# Altium PCB Copy of PCB1.PcbDoc (part 2 of 2)
Units mil, origin at the board's own origin, x right, y up, seen from the top; angles counter-clockwise.
Board outline 966 x 2841 mil, 4 copper layers (Top Layer, GND, POWER, Bottom Layer), stack 23.756 mil thick; 134 components, 79 nets, 491 pads, 121 vias.
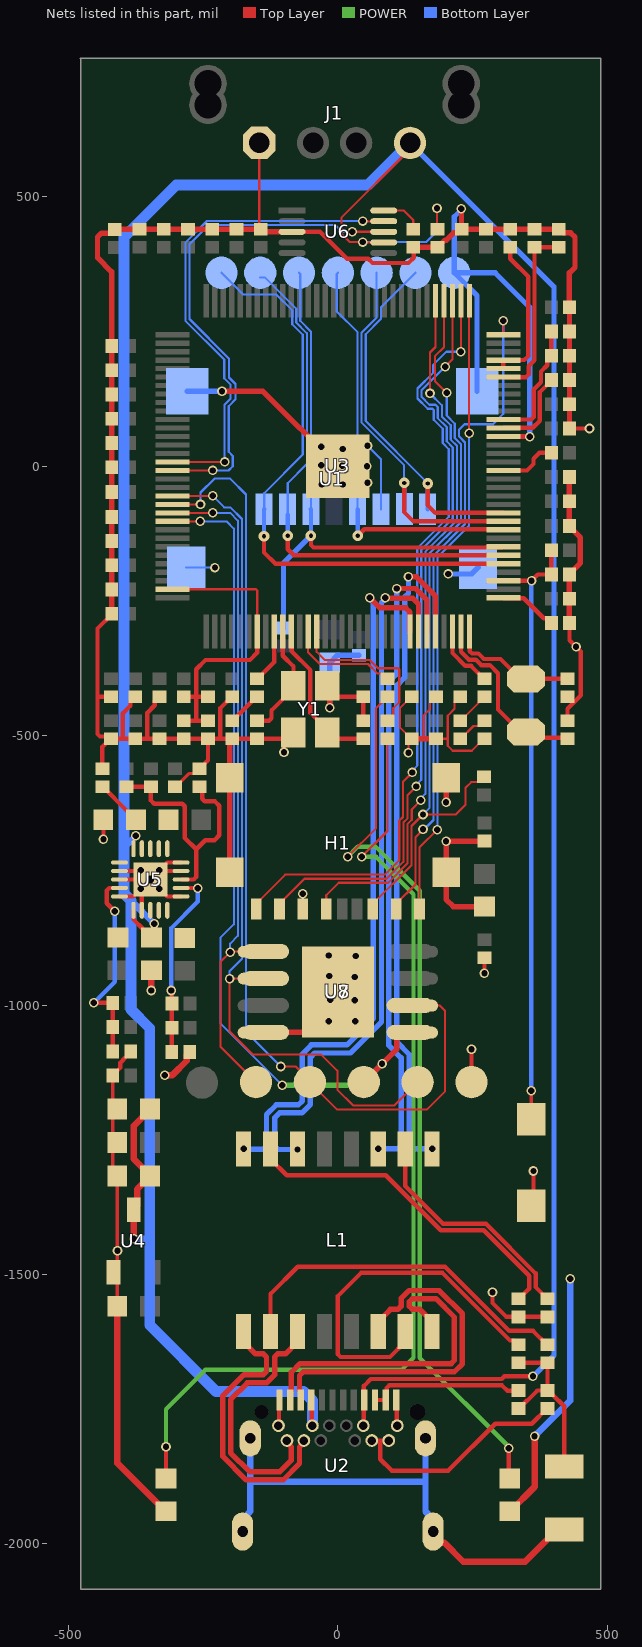
[diagram p4: the nets of this part, all layers, seen from the top]

## Via types
v1: diameter 17.72, hole 11.81, Top Layer to Bottom Layer, 111 vias
v2: diameter 19.68, hole 7.87, Top Layer to Bottom Layer, 6 vias
v3: diameter 20, hole 12, Top Layer to Bottom Layer, tented both sides, 4 vias

## Nets (pads, with @x,y where several pads share a name; then routed paths per layer and width w, separated by ;. In a path a pad name is that pad's centre, name@x,y a point inside that pad or via, vN(x,y) a via of type N, cw(c..) or ccw(c..) an arc to the next point about the centre after c; other vN are vias at no path point) (continued)
EGD: C17.2 R4.1 R5.1 R7.2 R8.2 | length 330.1
  Top Layer w8: R7.2@335,-1748.73 335.98,-1748.73 349.45,-1735.26 ; R5.1@335,-1663.73 R4.1@389,-1663.73 R8.2@389,-1715.27 ; C17.2@420,-1856.34 420,-1744.52 398.56,-1723.08 396.81,-1723.08 R8.2@389,-1715.27 ; 349.45,-1735.26 350.14,-1734.58 350.9,-1734.58 ; 349.45,-1735.26 350.22,-1735.26 350.9,-1734.58 ; 350.9,-1734.58 370.21,-1715.27 R8.2@389,-1715.27
FLASH1_CLK: TP11.1 U3.53 U7.6 U8.6 | length 1842.5
  Top Layer w4: U3.53@-307.09,-70.86 -306.95,-71 v1(-254.95,-71) ; v1(-106,-1114) -78,-1114 -52,-1140 TP11.1@-52,-1143 -1,-1194 165,-1194 199,-1160 199,-1011 188.67,-1000.67 U8.6@133.86,-1000.67 U8.6@134.03,-1000.83
  Bottom Layer w4: v1(-254.95,-71) -254.95,-48.95 -229,-23 -200,-23 -170.5,-52.5 -170.5,-1049.5 v1(-106,-1114)
FLASH1_CS: TP8.1 U3.54 U7.1 U8.1 | length 1277
  Top Layer w4: U3.54@-307.09,-86.61 v1(-232.09,-86.61) ; TP8.1@-152,-1143 -218,-1077 -218,-920 v1(-200,-902) -198.83,-900.83 -134.03,-900.83 U8.1@-133.86,-900.67
  Bottom Layer w4: v1(-232.09,-86.61) -199.89,-86.61 -185.5,-101 -185.5,-871.5 -200,-886 v1(-200,-902)
FLASH1_MISO: TP10.1 U3.52 U7.2 U8.2 | length 1618.9
  Top Layer w4: U3.52@-307.09,-55.12 v1(-232.09,-55.12) ; U8.2@-133.86,-950.67 -134.03,-950.83 -200.83,-950.83 v1(-201,-951) -201,-1048.48 -157.48,-1092 -31,-1092 -1,-1122 -1,-1157 28.5,-1186.5 104.5,-1186.5 TP10.1@148,-1143
  Bottom Layer w4: v1(-232.09,-55.12) -210.89,-76.32 -199.57,-76.32 -178,-97.89 -178,-914 -201,-937 v1(-201,-951)
FLASH1_MOSI: TP13.1 U3.55 U7.5 U8.5 | length 1598.4
  Top Layer w4: U3.55@-307.09,-102.36 v1(-255.09,-102.36) ; U8.5@133.86,-1050.67 U8.5@134.19,-1050.33
  Top Layer w10: v1(82,-1109) TP13.1@48,-1143 109.33,-1081.67 109.33,-1058.78 117.44,-1050.67 U8.5@133.86,-1050.67
  POWER w10: v1(-103,-1149) 42,-1149 v1(82,-1109)
  Bottom Layer w4: v1(-255.09,-102.36) -206.64,-102.36 -193,-116 -193,-850 -218,-875 -218,-1034 v1(-103,-1149)
GND: C1.2 C2.1 C3.2 C4.1 C5.1 C6.1 C7.1 C8.2 C9.1 C10.1 C11.1 C12.1 C13.1 C14.2 C15.1 C16.1 C18.2 C19.1 C20.1 C21.1 C22.1 C23.1 C24.1 C25.1 C26.1 C27.1 C28.1 C29.1 C30.1 C31.1 C32.1 C33.1 C34.1 C35.1 C36.1 C37.1 C38.1 C39.1 C40.1 C41.1 C42.1 C43.1 C44.1 C45.1 C47.1 C48.1 C49.1 C50.1 C51.1 C52.1 C53.1 C54.1 C55.1 C56.1 C57.1 C58.1 C59.1 C60.1 C61.1 C62.1 C63.1 C64.1 C65.1 C67.1 C68.1 C69.1 C70.1 C72.1 C73.1 C74.1 C76.1 D1.K D2.K H1.6 H1.10 H1.11 H1.12 H1.13 J1.1 R3.1 R11.2 R15.2 R18.2 R20.1 R22.2 R24.2 S1.2 TP7.1 TP12.1 U1.6 U1.9 U1.10 U1.11 U1.12 U2.A1 U2.A12 U2.B1 U2.B12 U3.0 U3.116 U4.1 U5.0 U5.1 U5.4 U5.5 U5.12 U5.13 U5.15 U5.17 U6.3 U7.4 U7.9 U8.4 Y1.2 Y1.4 | length 9514.1
  Top Layer w4: C55.1@-419.73,-274.98 C55.1@-419.73,-274 ; C27.1@-414,439.46 -143.27,439.46 -138.99,435.19 -138.8,435 U6.3@-85,435 ; R15.2@-200.78,-510.52 R15.2@-196,-505.73 ; C39.1@-146,442.2 J1.1@-146,600 ; U7.9@-64.95,-1050.67 0,-985.72 U7.9@0,-976 ; H1.6@-64.95,-831.59 H1.6@-64.95,-821.75 ; H1.6@-64.88,-826.67 v1(-64.88,-793.29) ; U3.0@0,0 U3.0@55,55 ; v1(131,-532) 131,-511.73 C16.1@137,-505.73 136.02,-505.73 115,-484.72 115,-449 126.2,-437.8 126.2,-437.54 136.02,-427.73 C56.1@137,-427.73 ; 159.5,-505.73 159.5,-462.38 171.2,-450.68 171.2,-437.54 181.02,-427.73 C25.1@182,-427.73 ; C24.1@182,-505.73 203.27,-505.73 204,-505 ; C23.1@227,-427.73 226.02,-427.73 216.2,-437.54 216.2,-450.68 204,-462.88 204,-505 ; R11.2@272,-505.73 271.02,-505.73 248.75,-528 213,-528 204,-519 204,-505 ; U3.116@307.09,55.11 U3.116@307.09,55.11 ; v1@355.94,55.06 v1(356,55) ; C19.1@429.73,-111.98 C19.1@429.73,-111
  Top Layer w6: C67.1@-417.73,-1131 -417.73,-1308.58 C50.1@-409.32,-1317 C51.1@-409.32,-1559 ; C72.1@-302,-595 -301.02,-595 -276.36,-570.35 -265.81,-570.35 R22.2@-257,-561.54
  Top Layer w8: C52.1@-437,-561.54 -437,-520.75 -421.98,-505.73 C58.1@-421,-505.73 ; C70.1@-435.32,-656 -435,-656.32 v1(-435,-692) ; C40.1@-421,-428 -445,-428 -446,-429 ; C55.1@-419.73,-274.98 -446,-301.25 -446,-429 ; C67.1@-417.73,-1131 -417.73,-1130.02 -403.58,-1115.86 -403.58,-1107.06 -398.42,-1101.9 -398.42,-1101.14 -384.27,-1086.98 R20.1@-384.27,-1086 ; U5.15@-405.13,-798.49 -379.49,-798.49 U5.0@-365.53,-784.53 ; U5.13@-405.13,-766.99 U5.0@-348,-767 ; U5.12@-405.13,-751.24 -363.76,-751.24 U5.0@-348,-767 ; C59.1@-376,-427.73 -376.98,-427.73 -384.8,-435.54 -384.8,-444.28 -399,-458.48 -399,-505.73 ; U5.17@-363.75,-824.13 -363.75,-782.75 U5.0@-348,-767 ; C48.1@-331,-427.73 -331.98,-427.73 -339.8,-435.54 -339.8,-443.78 -353.51,-457.49 -353.51,-505.22 -353,-505.73 ; D1.K@-319,-1939.31 D1.K@-319,-1939 ; U5.1@-290.87,-798.5 -316.5,-798.5 U5.0@-348,-767 ; U5.4@-290.87,-751.25 U5.0@-332.25,-751.25 ; U5.5@-290.87,-735.5 -316.5,-735.5 U5.0@-332.25,-751.25 ; R22.2@-257,-561.54 -256.02,-561.54 -248.2,-553.72 -248.2,-552.74 -241,-545.54 C47.1@-241,-505.73 ; C57.1@-196,-427.73 -196.98,-427.73 -218,-448.75 -218,-505.73 ; U2.B12@-110.24,-1780.59 -109.25,-1779.6 -109.25,-1733.94 U2.A1@-108.26,-1732.95 ; v1(-100,-531) -100,-510.73 -97,-507.73 Y1.4@-99,-505.73 ; U6.3@-85,435 -33,435 17,385 56.26,385 64.26,377 131,377 141,387 141,405.27 C68.1@140,406.27 ; Y1.4@-82.5,-494.31 -93.92,-505.73 Y1.4@-99,-505.73 ; Y1.2@-15,-413.6 -0.87,-427.73 C32.1@47,-427.73 C28.1@47,-472.27 ; U2.A12@108.27,-1732.95 109.25,-1733.93 109.25,-1779.6 U2.B1@110.23,-1780.59 ; TP12.1@248,-1143 v1(248,-1082) ; v1(272,-941) C6.1@272,-912.46 ; v1(287,-1533) 287,-1553 312.73,-1578.73 C8.2@335,-1578.73 C1.2@389,-1578.73 ; S1.2@363,-1372.12 v1(363,-1308) ; C38.1@426,-472.27 426,-450 451,-425 451,-344 v1(442,-335) 429.87,-322.87 429.87,-291.13 C18.2@429.73,-291 ; C14.2@430,70 v1(467,70) ; -446,-429 -446,-497 -441.31,-501.69 -425.05,-501.69 C58.1@-421,-505.73 ; C58.1@-421,-505.73 -399,-505.73 ; -399,-505.73 -353,-505.73 ; -353,-505.73 C47.1@-241,-505.73 ; U5.0@-348,-767 U5.0@-332.25,-751.25 ; C47.1@-241,-505.73 -218,-505.73 ; -218,-505.73 R15.2@-196,-505.73 Y1.4@-99,-505.73
  Top Layer w9: U3.116@307.09,55.11 v1@355.94,55.06
  Top Layer w10: C55.1@-419.73,-274 C30.1@-419.73,-229 C44.1@-419.73,-184 C43.1@-419.73,-139 C42.1@-419.73,-94 C60.1@-419.73,-48 C54.1@-419.73,-2 C61.1@-419.73,88 C63.1@-419.73,133 C53.1@-419.73,178 C64.1@-419.73,223 -419.73,360.73 -446,387 -446,425 -438.35,432.65 -420.81,432.65 C27.1@-414,439.46 -413.87,439.6 -143.4,439.6 C39.1@-143.27,439.46 ; v1(-215,139) -139,139 U3.0@0,0 ; H1.10@-200.78,-753.44 H1.11@-200.78,-578.25 R15.2@-200.78,-510.52 ; C39.1@-138.99,435.19 -85.19,435.19 U6.3@-85,435 ; U8.4@-133.86,-1050.67 U7.9@-64.95,-1050.67 ; Y1.2@-19.5,-407.69 -15,-412.2 -15,-413.6 v1(-15,-448) ; C16.1@137,-505.73 159.5,-505.73 C24.1@182,-505.73 ; C68.1@140,406.27 C69.1@185,406.27 185.98,406.27 199.14,419.42 201.32,419.42 214.82,432.92 223.19,432.92 C31.1@230,439.73 ; v1(200.78,-696) H1.13@200.78,-753.44 200.78,-803.78 214.31,-817.32 C7.1@272,-817.32 ; v1@200.78,-695.73 C73.1@272,-695.73 ; v1(200.78,-623.78) H1.12@200.78,-578.25 ; v1(229,478) 229.5,477.5 229.5,440.23 C31.1@230,439.73 ; C18.2@429.73,-291 C41.1@429.73,-201 429.73,-200.02 450.08,-179.66 450.08,-132.34 C19.1@429.73,-111.98 ; C19.1@429.73,-111 C20.1@429.73,-65 C15.1@429.73,-20 C15.1@429.73,-19.02 ; C14.2@430,70 429.87,70.13 429.87,294.87 C21.1@429.73,295 429.73,358.76 440,369.03 440,425 432.08,432.92 416.81,432.92 C3.2@410,439.73 C31.1@230,439.73
  Top Layer w12: C51.1@-409.32,-1559 -409.32,-1849.98 -319.98,-1939.31 D1.K@-319,-1939.31 ; v1(-346,-973) C74.1@-346,-935.32 ; v1(-320.95,-1129.95) -307,-1130 -280.61,-1103.61 -280.61,-1092.81 R24.2@-274.8,-1087 ; D2.K@319,-1939.31 319.98,-1939.31 365,-1894.3 v1(365,-1800)
  Bottom Layer w4: U1.12@-281.49,-188.07 v1(-228.07,-188.07) ; v1(55,38) 80,13 U1.6@80,-80
  Bottom Layer w10: U1.9@-279.91,138.86 -279.77,139 v1(-215,139) ; v1(-15,-448) C10.1@-15,-364.32 -14.02,-364.32 -0.43,-350.73 C9.1@39,-350.73 ; v1(205,-200) 248.31,-200 U1.11@260.24,-188.07 ; v1(229,478) 229,475.91 216,462.91 TP7.1@216,359 ; U1.10@258.27,138.86 258.27,316.72 TP7.1@216,359 ; v1(356,55) 356,295 292,359 TP7.1@216,359
  Bottom Layer w12: v1(365,-1800) 431,-1734 v1(431,-1508)
  other v1: -408.95,-1455.95 -17,-1030 32,-1030 31,-991 -14,-990 31,-948 -16,-946 33,-909 -17,-908 -30,-34 9,-34 55,-31 54,0 8,1 -31,2 9,32 -31,36
  other v3: -365.67,-784.4 -331.37,-784.4 -365.67,-749.6 -331.37,-749.6
GROUND: C17.1 U2.1 U2.2 U2.3 U2.4 | length 978.9
  Top Layer w12: U2.3@176.77,-1977.04 176.77,-1985.38 189.41,-1998.03 197.75,-1998.03 232.73,-2033 347.47,-2033 406.81,-1973.66 C17.1@420,-1973.66
  Bottom Layer w12: U2.2@-176.78,-1977.04 -176.78,-1953.89 -162.6,-1939.72 -162.6,-1885 ; U2.1@-162.6,-1804.21 -162.6,-1885 ; U2.4@162.6,-1804.21 162.6,-1884 ; U2.3@176.77,-1977.04 176.77,-1953.89 162.6,-1939.72 162.6,-1884 ; -162.6,-1885 161.6,-1885 162.6,-1884
HPCOM: C2.2 U3.124 U3.125 | length 281
  Top Layer w8: U3.124@307.09,181.09 U3.125@307.09,196.84 307.24,197 346,197 353.5,204.5 353.5,351.5 320,385 C2.2@320,406.27
LINK: R13.1 U3.77 | length 206
  Top Layer w4: U3.77@-55,-306.97 U3.77@-55.11,-307.09 -55.11,-345.66 -33.64,-367.13 55.88,-367.13 73.2,-384.46 82.19,-384.46 R13.1@92,-394.27
NetC1_1: C1.1 L1.2 | length 434.1
  Top Layer w8: L1.2@125,-1267.26 125,-1335.74 195.26,-1406 275,-1406 367,-1498 367,-1523.27 C1.1@389,-1545.27
NetC8_1: C8.1 L1.7 | length 640.2
  Top Layer w8: L1.7@-125,-1267.26 -125,-1286.02 -95.02,-1316 89,-1316 191,-1418 270.74,-1418 355,-1502.26 355,-1526.25 335.98,-1545.27 C8.1@335,-1545.27
NetC66_1: C66.1 R19.1 R20.2 U5.14 | length 382
  Top Layer w8: v1(-453,-996) C66.1@-417.73,-996 R20.2@-417.73,-1086 ; v1(-413.95,-825.95) -429,-811 -429,-787.49 -424.31,-782.8 -405.2,-782.8 U5.14@-405.13,-782.74
  Bottom Layer w8: v1(-453,-996) -413.95,-956.95 v1(-413.95,-825.95)
NetC71_1: C71.1 R21.1 R22.1 U5.3 | length 477.7
  Top Layer w8: C71.1@-392,-595 R21.1@-347,-595 -347,-620.31 -340.81,-626.5 -288.69,-626.5 -284,-631.19 -284,-690 -263,-711 ; U5.3@-290.87,-767 -267.69,-767 -263,-762.31 -263,-711 ; R22.1@-257,-595 -251.69,-600.31 -251.69,-617.31 -247,-622 -228,-622 -220,-630 -220,-685 -229,-694 -246,-694 -263,-711
NetC75_1: C75.1 R23.1 R24.1 U5.2 | length 355.8
  Top Layer w8: v1(-309,-973) -308.5,-973.5 -308.5,-996.5 R23.1@-308,-997 -308.13,-997.13 -308.13,-1086.87 R24.1@-308.27,-1087 ; U5.2@-290.87,-782.75 -290.8,-782.81 -260.09,-782.81 v1(-259.95,-782.95)
  Bottom Layer w8: v1(-309,-973) -309,-857 -260,-808 v1(-259.95,-782.95)
NetD1_A: D1.A R12.2 | length 1852.2
  Top Layer w4: v1(44,-725) 92,-677 R12.2@92,-505.73
  Top Layer w8: D1.A@-319,-1878.68 v1(-319,-1820)
  POWER w8: v1(-319,-1820) -319,-1750 -246,-1677 118,-1677 140.5,-1654.5 140.5,-794.5 71,-725 v1(44,-725)
NetD2_A: D2.A R13.2 | length 1664.2
  Top Layer w4: v1(18,-725) 71,-672 71,-448.73 81.2,-438.53 81.2,-437.54 91.02,-427.73 R13.2@92,-427.73
  Top Layer w8: v1(316.99,-1822.43) 316.99,-1876.67 D2.A@319,-1878.68
  POWER w8: v1(18,-725) 37,-706 70,-706 152,-788 152,-1654.74 316.99,-1819.72 v1(316.99,-1822.43)
NetL1_10: L1.10 R4.2 | length 664.9
  Top Layer w8: L1.10@-125,-1606 -125,-1536 -74.5,-1485.5 198.76,-1485.5 317.89,-1604.63 362.37,-1604.63 388.02,-1630.27 R4.2@389,-1630.27
NetL1_15: L1.15 R5.2 | length 673.5
  Top Layer w8: L1.15@125,-1606 125,-1624.76 96.76,-1653 5,-1653 0,-1648 0,-1540 43,-1497 194,-1497 319.46,-1622.46 327.19,-1622.46 R5.2@335,-1630.27
NetL2_1: L2.1 U5.11
NetL3_1: L3.1 U5.6
NetL4_1: L4.1 U5.20
NetR6_1: R6.1 U3.112 | length 108.7
  Top Layer w8: U3.112@307.09,-7.88 351.12,-7.88 363,4 363,14 374,25 R6.1@396.27,25
NetR7_1: R7.1 U2.A10 U2.A11 | length 293.7
  Top Layer w8: U2.A10@68.9,-1732.95 U2.A11@88.59,-1732.95 90.49,-1731.04 90.49,-1710.69 95.41,-1705.77 304.77,-1705.77 314.89,-1715.89 334.38,-1715.89 R7.1@335,-1715.27
NetR8_1: R8.1 U2.B2 U2.B3 | length 432.9
  Top Layer w8: U2.B3@62.99,-1808.14 78.74,-1808.14 ; U2.B2@94.48,-1808.14 78.74,-1808.14 ; R8.1@389,-1748.73 388.02,-1748.73 359.75,-1777 292,-1777 205,-1864 100,-1864 78.74,-1842.74 78.74,-1808.14
NetR9_2: R9.2 R10.1 | length 64.3
  Top Layer w4: R10.1@227,-472.27 227.98,-472.27 261.2,-439.05 261.2,-437.54 271.02,-427.73 R9.2@272,-427.73
NetR10_2: R10.2 R11.1 | length 58.9
  Top Layer w4: R10.2@227,-505.73 227.98,-505.73 251.64,-482.08 262.19,-482.08 R11.1@272,-472.27
NetR14_2: R14.2 R15.1 | length 64.7
  Top Layer w8: R15.1@-196,-472.27 -195.02,-472.27 -187.2,-464.46 -187.2,-463.95 -150.98,-427.73 R14.2@-150,-427.73
OSC32_IN: C37.2 U3.96 Y2.1 | length 239.6
  Top Layer w8: U3.96@244.1,-307.09 244.9,-307.89 244.9,-343.62 248.78,-347.5 260.76,-347.5 270.94,-357.68 301.68,-357.68 339,-395 Y2.1@349,-395 349.73,-394.27 C37.2@426,-394.27
OSC32_OUT: C38.2 U3.95 Y2.2 | length 341.2
  Top Layer w8: U3.95@228.35,-307.09 228.38,-307.13 228.38,-344.38 243,-359 256,-359 266.18,-369.18 282.12,-369.18 297,-384.05 297,-451.43 349.4,-503.83 424.1,-503.83 C38.2@426,-505.73
PWR: C50.2 C52.2 C65.2 C69.2 C70.2 C74.2 J1.4 U2.A4 U2.A9 U2.B4 U2.B9 U4.3 U5.7 U5.8 U5.9 U5.10 U5.16 U5.18 U5.19 U6.7 | length 6990.5
  Top Layer w4: U6.7@78.31,415.31 46,415.31 45.34,415.97 22.03,415.97 7,431 7,461.82 134,588.82 J1.4@134,600 ; v1(184,479) 184,440.73 C69.2@185,439.73
  Top Layer w8: C52.2@-437,-595 -436.02,-595 -390.31,-640.71 -388.99,-640.71 -374.68,-655.02 C70.2@-374.68,-656 ; U5.16@-379.5,-824.13 -379.43,-824.2 -379.43,-841.25 -361.29,-859.39 -361.29,-860.38 -346.98,-874.68 C74.2@-346,-874.68 ; U2.A4@-49.22,-1732.95 -48.23,-1733.93 -48.23,-1779.6 U2.B9@-47.25,-1780.59 ; U2.B4@47.24,-1780.59 48.23,-1779.6 48.23,-1706.77 61,-1694 304,-1694 309,-1689 v1(362.05,-1688.95)
  Top Layer w12: v1(-378.95,-1433.95) U4.3@-379,-1379.93 -372.2,-1373.13 -372.2,-1341.5 -348.68,-1317.98 -348.68,-1316.02 -379,-1285.7 -379,-1224.3 -348.68,-1193.98 C65.2@-348.68,-1193
  Bottom Layer w4: v1(46,415.97) 163.97,415.97 184,436 v1(184,479)
  Bottom Layer w10: J1.4@134,600 401,333 401,-1650 v1(362.05,-1688.95)
  Bottom Layer w12: -397,-708 v1(-374.95,-685.95) ; -383.95,-805.95 v1(-340.95,-848.95) ; v1(-378.95,-1433.95) -378.91,-1434 -349,-1434
  Bottom Layer w20: U2.B9@-47.25,-1780.59 -47.25,-1733.75 -64,-1717 -226,-1717 -349,-1594 -349,-1434 -349,-1043 -383.95,-1008.05 -383.95,-805.95 -397,-792.91 -397,-708 -397,425 -300,522 56,522 J1.4@134,600
RESET: C41.2 R16.1 S1.1 U3.99 | length 1138.8
  Top Layer w6: S1.1@359,-1211.88 359.4,-1211.49 359,-1211.09 v1(359,-1159)
  Top Layer w8: U3.99@307.09,-212.61 v1(359.4,-212.61) 371,-201 C41.2@396.27,-201 R16.1@396.27,-156
  Bottom Layer w8: v1(359,-1159) 359,-213 v1(359.4,-212.61)
RTC_VIO: C18.1 U3.97 | length 109.2
  Top Layer w8: U3.97@307.09,-244.09 307.95,-244.97 344.97,-244.97 382.2,-282.2 388.46,-282.2 396.27,-290.02 C18.1@396.27,-291
RTX: R9.1 U3.94 | length 118.7
  Top Layer w8: U3.94@212.6,-307.09 212.6,-346.61 236.5,-370.5 247.25,-370.5 271.02,-394.27 R9.1@272,-394.27
RX_n: L1.8 U3.89 | length 1333
  Top Layer w10: v1(59,-244) 78,-263 126,-263 133.73,-270.74 133.73,-306.96 U3.89@133.86,-307.09
  Bottom Layer w10: v1(-175,-1267) -174.5,-1267.5 -138.36,-1267.5 -132.5,-1261.64 -132.5,-1203.29 -114.21,-1185 -73,-1185 -66,-1178 -66,-1090.79 -49.21,-1074 17,-1074 66,-1025 66,-253.09 59,-246.09 v1(59,-244)
RX_p: L1.6 U3.90 | length 1328.7
  Top Layer w10: v1(88,-244) 88.86,-244.86 138.86,-244.86 149.6,-255.61 U3.90@149.6,-307.09
  Bottom Layer w10: v1(-75,-1268) -111.14,-1268 -117.5,-1261.64 -117.5,-1209.5 -108,-1200 -66.79,-1200 -51,-1184.21 -51,-1097 -43,-1089 23.21,-1089 81,-1031.21 81,-253.09 88,-246.09 v1(88,-244)
RXD_n: L1.9 U2.B10 | length 531.4
  Top Layer w10: L1.9@-175,-1606 -175,-1624.76 -152.5,-1647.26 -138.36,-1647.26 -132.5,-1653.11 -132.5,-1680.14 -138.36,-1686 -174.21,-1686 -214,-1725.79 -214,-1837.21 -170.21,-1881 -101.37,-1881 -71.24,-1850.87 -71.24,-1820.08 -62.99,-1811.83 U2.B10@-62.99,-1808.14
RXD_p: L1.11 U2.B11 | length 481.7
  Top Layer w10: U2.B11@-94.49,-1808.14 -94.49,-1811.83 -86.24,-1820.08 -86.24,-1844.66 -107.58,-1866 -164,-1866 -199,-1831 -199,-1732 -168,-1701 -132.14,-1701 -117.5,-1686.36 -117.5,-1653.11 -111.64,-1647.26 -97.5,-1647.26 -75,-1624.76 L1.11@-75,-1606
SD_CLK: TP4.1 U1.5 U3.105 | length 780.5
  Top Layer w8: v2(37,-129) 49,-117 275.26,-117 275.51,-117.24 306.22,-117.24 U3.105@307.09,-118.11
  Bottom Layer w4: TP4.1@0,359 -2,357 -2,287 36.6,248.4 U1.5@36.6,-80
  Bottom Layer w8: U1.5@36.6,-80 37,-80.4 v2(37,-129)
SD_CMD: R1.1 TP3.1 U1.3 U3.103 | length 1066.4
  Top Layer w8: v2(-50,-129) -50,-146.31 -45.31,-151 274.98,-151 275.51,-150.47 306.22,-150.47 U3.103@307.09,-149.61
  Bottom Layer w4: TP3.1@-72,359 -69.8,356.8 -69.8,269.8 -50.07,250.07 U1.3@-50.07,-80
  Bottom Layer w8: U1.3@-50.07,-80 -50,-80.07 v2(-50,-129)
  Bottom Layer w10: R1.1@-101,-300.27 -101,-180 v2(-50,-129)
SD_D0: TP5.1 U1.7 U3.106 | length 728.4
  Top Layer w8: v2(123,-31) 123,-85 140.36,-102.36 U3.106@307.09,-102.36
  Bottom Layer w4: TP5.1@72,359 72,276 44.1,248.1 44.1,80.9 123,2 v2(123,-31)
  Bottom Layer w8: v2(123,-31) 123,-79.36 U1.7@123.34,-79.7
SD_D1: TP6.1 U1.8 U3.107 | length 711.9
  Top Layer w8: v2(167,-32) 167,-73 180.61,-86.61 U3.107@307.09,-86.61
  Bottom Layer w4: TP6.1@144,359 80,295 80,273.39 51.6,244.99 51.6,84.01 167,-31.39 v2(167,-32)
  Bottom Layer w8: U1.8@166.74,-80 167,-79.74 v2(167,-32)
SD_D2: TP1.1 U1.1 U3.101 | length 1100.1
  Top Layer w8: v2(-137,-130) -137,-160 -115.89,-181.11 U3.101@307.09,-181.11
  Bottom Layer w4: TP1.1@-216,359 -175.74,318.74 -114.35,318.74 -84.8,289.2 -84.8,263.59 -65.07,243.86 -65.07,21.63 -136.7,-50 U1.1@-136.7,-80
  Bottom Layer w8: v2(-137,-130) -137,-80.3 U1.1@-136.7,-80
SD_D3: TP2.1 U1.2 U3.102 | length 964.5
  Top Layer w8: v2(-93,-129) -93,-154 -81.64,-165.36 U3.102@307.09,-165.36
  Bottom Layer w4: TP2.1@-144,350 -135,350 -77.3,292.3 -77.3,266.7 -57.57,246.96 -57.57,4 -93,-31.43 U1.2@-93,-90
  Bottom Layer w8: v2(-93,-129) U1.2@-93,-90
SDIO_CLK: H1.5 U3.5 | length 1308
  Top Layer w4: H1.5@-21.66,-821.75 -21.66,-796.06 1.41,-773 93.27,-773 129,-737.27 129,-664.21 137,-656.21 137,-637 v1(154,-620) ; v1(171,135) 171,211 181.1,221.11 U3.5@181.1,307.09
  Bottom Layer w4: v1(154,-620) 154,-616.29 162.36,-607.93 162.36,-158.65 221,-100.01 221,37.79 209.5,49.29 209.5,75.89 193,92.39 193,113 v1(171,135)
SDIO_CMD: H1.3 R2.2 U3.4 | length 1383.8
  Top Layer w4: H1.3@64.97,-821.75 64.97,-811.91 136.5,-740.37 136.5,-667.84 v1(158,-646.34) 218.66,-646.34 237,-628 237,-597 247.65,-586.35 261.19,-586.35 R2.2@271,-576.54 ; U3.4@196.85,307.09 196.85,220.86 180,204 180,158 v1(202,136)
  Bottom Layer w4: v1(158,-646.34) 169.86,-634.48 169.86,-162.14 228.5,-103.5 228.5,40.89 217,52.39 217,79 202,94 v1(202,136)
SDIO_D0: H1.7 U3.3 | length 1405.8
  Top Layer w4: H1.7@-108.26,-821.75 -108.26,-811.91 -61.86,-765.5 90.16,-765.5 121.5,-734.16 121.5,-661.11 129.5,-653.11 129.5,-610.18 v1(145.34,-594.34) ; v1(199.15,184.85) 199.15,185.15 212.6,198.61 U3.3@212.6,307.09
  Bottom Layer w4: v1(145.34,-594.34) 145.34,-591.64 154.86,-582.13 154.86,-155.54 213.33,-97.07 213.33,34.85 202,46.18 202,72.79 185.5,89.29 185.5,109.89 181.2,114.2 169.8,114.2 155.2,128.8 155.2,141.2 198.85,184.85 v1(199.15,184.85)
SDIO_D1: H1.8 U3.2 | length 1463.6
  Top Layer w4: H1.8@-151.57,-821.75 -151.57,-811.91 -97.67,-758 87.05,-758 114,-731.05 114,-658 121,-651 121,-585.68 v1(138.34,-568.34) ; v1(228.35,212.34) U3.2@228.35,307.09
  Bottom Layer w4: v1(138.34,-568.34) 138.34,-564.64 147.36,-555.63 147.36,-152.44 205.83,-93.97 205.83,31.75 194.5,43.07 194.5,69.68 178,86.18 178,104.35 175.66,106.7 166.7,106.7 147.7,125.7 147.7,144.3 177.02,173.63 177.02,188.02 201.35,212.34 v1(228.35,212.34)
SDIO_D2: H1.1 U3.1 | length 1168
  Top Layer w4: H1.1@151,-821.17 H1.1@151.57,-821.75 151.57,-707.43 v1(184.5,-674.5) ; v1(243.5,61.5) 243.5,306.49 U3.1@244.1,307.09
  Bottom Layer w4: v1(184.5,-674.5) 184.86,-674.14 184.86,-169.14 243.5,-110.5 v1(243.5,61.5)
SDIO_D3: H1.2 U3.128 | length 1240.5
  Top Layer w4: H1.2@108,-821.48 108,-812.17 144,-776.17 144,-688.68 158,-674.68 v1(158,-674) ; v1(307,270) 307.09,269.91 U3.128@307.09,244.09
  Bottom Layer w4: v1@159,-675 177.36,-656.64 177.36,-166.04 236,-107.39 236,44 225,55 225,68 235,78 287.87,78 307,97.13 v1(307,270)
SPD: R12.1 U3.78 | length 309.1
  Top Layer w4: U3.78@-39.36,-307.09 -39.36,-344.64 -24.37,-359.63 58.99,-359.63 74.35,-375 111.66,-375 114,-377.34 114,-438.12 102.8,-449.32 102.8,-462.46 92.98,-472.27 R12.1@92,-472.27
SVREF: C46.1 C47.2 R17.2 R18.1 U3.63 U3.71 | length 584.2
  Top Layer w4: U3.63@-307.09,-228.34 -151.95,-228.34 -149.61,-230.69 U3.71@-149.61,-307.09
  Top Layer w8: R18.1@-286,-472.27 -263,-472.27 C47.2@-241,-472.27 ; R17.2@-286,-427.73 -263,-427.73 ; -263,-471 -263,-427.73 ; C46.1@-241,-427.73 -263,-427.73 ; U3.71@-149.61,-307.09 -149.61,-346 -163.11,-359.5 -245.81,-359.5 -263,-376.69 -263,-427.73
SZQ: R14.1 U3.73 | length 101
  Top Layer w8: R14.1@-150,-394.27 -149.02,-394.27 -118.11,-363.36 U3.73@-118.11,-307.09
TX_n: L1.3 U3.91 | length 1218.7
  Top Layer w10: v1(109,-227) 144.35,-227 165.35,-248 U3.91@165.35,-307.09
  Bottom Layer w10: v1(75,-1267) 111.64,-1267 117.5,-1261.14 117.5,-1098 94.5,-1075 94.5,-400.5 109,-386 v1(109,-227)
TX_p: L1.1 U3.92 | length 1250.6
  Top Layer w10: v1(131,-205) 145.1,-205 181.1,-241 U3.92@181.1,-307.09
  Bottom Layer w10: v1(131,-205) 131,-236 124,-243 124,-392.21 109.5,-406.71 109.5,-1068.79 132.5,-1091.79 132.5,-1261.14 138.36,-1267 v1(175,-1267)
TXD_n: L1.14 U2.A3 | length 675.5
  Top Layer w10: U2.A3@-68.89,-1732.95 -68.89,-1719.17 -71.24,-1716.83 -71.24,-1687.64 -64.09,-1680.5 216.36,-1680.5 231,-1665.86 231,-1572.79 187.96,-1529.74 132.14,-1529.74 117.5,-1544.39 117.5,-1558.89 111.64,-1564.74 97.5,-1564.74 75,-1587.24 L1.14@75,-1606
TXD_p: L1.16 U2.A2 | length 625.8
  Top Layer w10: U2.A2@-88.58,-1732.95 -88.58,-1719.17 -86.24,-1716.83 -86.24,-1681.43 -70.31,-1665.5 210.14,-1665.5 216,-1659.64 216,-1579 181.74,-1544.74 138.36,-1544.74 132.5,-1550.6 132.5,-1558.89 138.36,-1564.74 152.5,-1564.74 175,-1587.24 L1.16@175,-1606
UART0_RX: U3.49 U6.8 | length 951.4
  Top Layer w4: U3.49@-307.09,-7.88 v1(-232.09,-7.88) ; v1(26.75,435) U6.8@85,435
  Bottom Layer w4: v1(-232.09,-7.88) -202.88,-7.88 -195,0 -195,19 -202.59,26.59 -202.59,111.41 -190,124 -190,152.61 -202,164.61 -202,199.61 -275.5,273.11 -275.5,411.89 -239.89,447.5 -5,447.5 7.5,435 v1(26.75,435)
UART0_TX: U3.48 U6.9 | length 928.5
  Top Layer w4: U3.48@-307.09,7.88 v1(-210.09,7.88) ; v1(46,455) 46.66,454.34 84.66,454.34 U6.9@85,454.68
  Bottom Layer w4: v1(-210.09,7.88) -210.09,114.52 -199,125.61 -199,151 -211,163 -211,198 -283,270 -283,415 -243,455 v1(46,455)
V3: C68.2 U6.10 | length 79.5
  Top Layer w4: U6.10@85,474.37 122.63,474.37 140,457 C68.2@140,439.73
VHP: C3.1 C4.2 U3.123 | length 334.6
  Top Layer w8: U3.123@307.09,165.36 349.27,165.36 353.96,170.04 353.96,185.43 365,196.47 C4.2@365,406.27 C3.1@410,406.27
VRA1: C11.2 U3.117 | length 157.8
  Top Layer w8: U3.117@307.09,70.86 307.58,71.36 361.81,71.36 374.89,84.44 374.89,137.63 396.27,159.02 C11.2@396.27,160
VRA2: C5.2 R3.2 U3.118 | length 230.6
  Top Layer w8: U3.118@307.09,86.61 358.7,86.61 363.39,91.3 363.39,142.4 376.96,155.97 376.96,175.9 388.46,187.4 388.46,197.19 R3.2@396.27,205 C5.2@396.27,250
X24MIN: C28.2 U3.75 Y1.1 | length 286.3
  Top Layer w8: U3.75@-86.61,-307.09 -86.61,-316 -85.74,-316.87 -85.74,-343.64 -51,-378.39 -51,-457.89 -19.5,-489.39 Y1.1@-19.5,-494.31 -8.08,-505.73 C28.2@47,-505.73
X24MOUT: C29.2 U3.74 Y1.3 | length 214.4
  Top Layer w8: C29.2@-150,-472.27 -127.69,-472.27 -123,-467.58 -123,-453.12 -82.5,-412.61 Y1.3@-82.5,-407.69 -82.5,-371.5 -102.36,-351.64 U3.74@-102.36,-307.09
pads on no net: H1.9 J1.0 L1.4 L1.5 L1.12 L1.13 U2. U2.A5 U2.A8 U2.B5 U2.B8 U3.6 U3.7 U3.8 U3.9 U3.10 U3.11 U3.13 U3.14 U3.15 U3.16 U3.17 U3.18 U3.22 U3.23 U3.24 U3.27 U3.28 U3.30 U3.31 U3.32 U3.33 U3.34 U3.35 U3.36 U3.37 U3.39 U3.40 U3.41 U3.42 U3.43 U3.44 U3.45 U3.46 U3.81 U3.82 U3.83 U3.84 U3.86 U3.87 U3.100 U3.113 U3.114 U3.119 U3.120 U3.121 U6.4 U6.5 U6.6

## Polygon pours and split planes (outlines as drawn)
GND on GND "GND_L02_P000" (solid, pour order 0): -477,-2084 490,-2084 490,758 -479,758
GND on Top Layer "GND_L01_P002" (solid, pour order 2): -477,757 -477,-2084 488,-2084 488,757
GND on POWER "GND_L03_P003" (solid, pour order 3): -477,-2084 488,-2084 488,757 -477,757
GND on Bottom Layer "GND_L04_P004" (solid, pour order 4): -477,-2084 488,-2084 488,757 -477,757

## Keep-outs
Keep-Out Layer:
  lines w10: -479.5,677.5 cw(c-399.5,677.5) -399.5,757.5 ; -479,677.5 -479,-2006 ccw(c-399,-2006) -399,-2086 -177,-2086 410,-2086 ccw(c410,-2006) 490,-2006 490,678 ccw(c410,678) 410,758 -399.5,758

## Other copper
Top Layer:
  rectangle net NetL2_1: -460,-893 -420,-856
  rectangle net NetL2_1: -460,-880 -438,-717
  rectangle net NetL2_1: -449,-739 -403,-717
  rectangle net NetL4_1: -316.5,-864 -272,-824.13
  rectangle net PWR: -348,-871 -333,-808
  rectangle net PWR: -393,-701 -357,-670
  rectangle net PWR: -393,-726 -332,-694
  rectangle net NetL3_1: -320,-726 -304,-668
  text "Fast_Linux_A" at 429.57,-1098 h100 r90
Bottom Layer:
  text "2023-11-12" at 134.04,-2006.33 h60
  text "Designed by Lightning" at 260,-2062.73 h60

## Silkscreen, mask and mechanical layers (free items; w line width, h text height)
Top Overlay:
  lines w10: -479,-2006 -479,-2083 -476,-2086 -399,-2086 ; -479,722 -479,758 -438,758 ; 410,-2086 489,-2086 490,-2085 490,-2006 ; 462,758 490,758 490,734
  text "CONSOLE" at 218,509.52 h50
  text "NOR" at 287.38,-1066 h60 r90
  text "CS" at -187,-1218.38 h60
  text "CK" at -88,-1218.38 h60
  text "MO" at 17,-1218.38 h60
  text "MI" at 125,-1217.71 h60
  text "VCC" at -205.62,-1297.96 h60 r90
  text "GND" at 251.38,-1300 h60 r90
  text "JLCJLCJLCJLC" at -236,-1462 h40
  text "RST" at 381.38,-1512 h60 r90
  text "LINK" at 274,-1983 h100 r90
  text "SPD" at -212.04,-1988 h100 r90
Bottom Overlay:
  text "D2" at -237,397 h60 r270
  text "D3" at -164.33,396 h60 r270
  text "CMD" at -92.38,396 h60 r270
  text "CLK" at -19.38,396 h60 r270
  text "D0" at 52.62,396 h60 r270
  text "GND" at 194.62,396 h60 r270
  text "D1" at 125.67,395 h60 r270
  text "SD CARD" at 317,-299.38 h60
  text "东湖方案组" at 233.87,-1312.57 h100

## Text inside footprints (layer, text, board x,y; h text height)
J1: Top Overlay "G" at 124,650 h30; Top Overlay "V" at -166,650 h30; Top Overlay "D+" at 4,650 h30; Top Overlay "D-" at -66,650 h30
U1: Bottom Overlay "LOCK" at -240.57,-123.43 h35.43 r270; Bottom Overlay "OPEN" at 124.79,107.36 h35.43 r270